# Altium PCB GMAX4651_MB.PcbDoc (part 2 of 2)
Units mm, origin at the board's own origin, x right, y up, seen from the top; angles counter-clockwise.
Board outline 185 x 150 mm, 2 copper layers (Top Layer, Bottom Layer); 162 components, 61 nets, 664 pads, 401 vias.
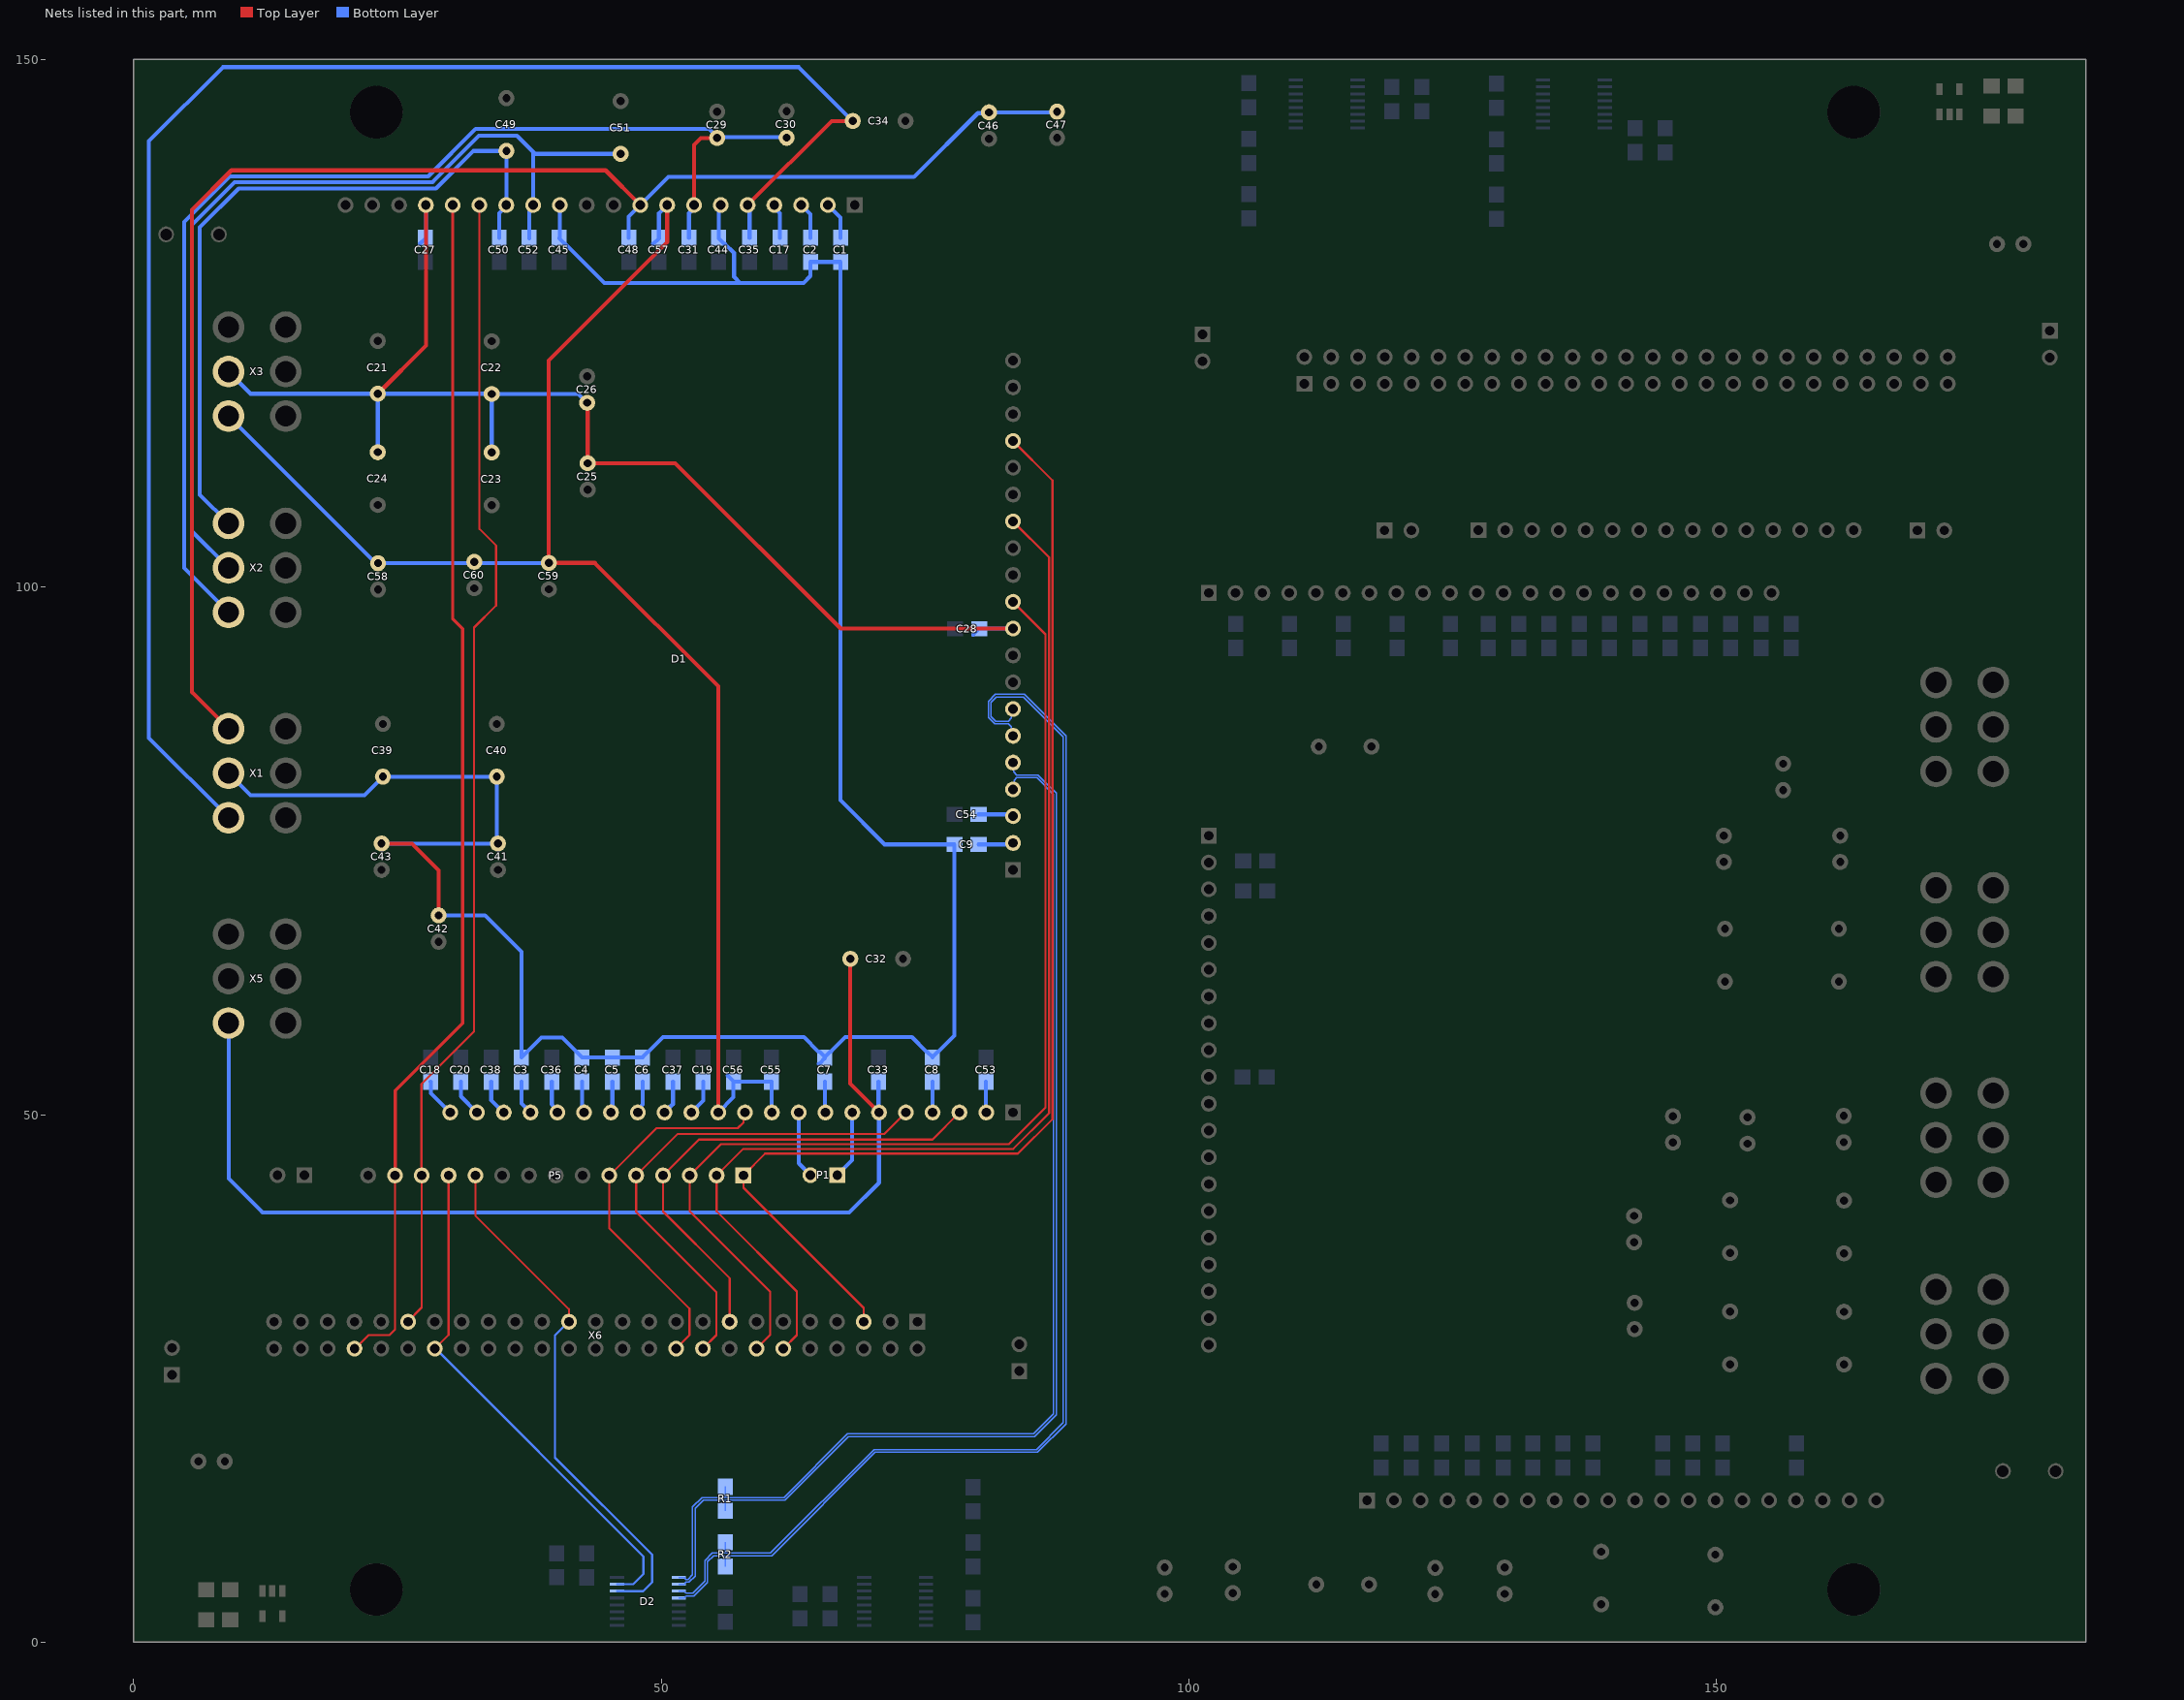
[diagram p2: the nets of this part, all layers, seen from the top]

## Via types
v1: diameter 0.6, hole 0.3, Top Layer to Bottom Layer, 401 vias

## Nets (pads, with @x,y where several pads share a name; then routed paths per layer and width w, separated by ;. In a path a pad name is that pad's centre, name@x,y a point inside that pad or via, vN(x,y) a via of type N, cw(c..) or ccw(c..) an arc to the next point about the centre after c; other vN are vias at no path point) (continued)
OUTT12: D2.14 P5.11 X6.27 | length 50.3
  Top Layer w0.203: P5.11@32.381,44.247 32.381,40.441 41.246,31.576 X6.27@41.246,30.378
  Bottom Layer w0.203: X6.27@41.235,30.389 39.929,29.083 39.929,17.501 49.124,8.306 49.124,5.69 48.281,4.847 D2.14@45.81,4.847
OUTT12_N: D1.48 D2.4 R2.2 | length 126.1
  Bottom Layer w0.127: D2.4@51.66,4.197 52.195,4.197 52.271,4.273 52.271,4.319 52.346,4.393 53.093,4.393 54.384,5.685 54.384,7.641 54.954,8.21 56.005,8.21 56.079,8.136 ; D1.48@83.332,85.908 83.172,86.068 83.172,86.774 82.903,87.043 81.58,87.043 80.998,87.625 80.998,89.184 81.656,89.843 84.409,89.843 88.344,85.908 88.344,77.47 88.344,20.696 85.657,18.009 70.264,18.009 60.466,8.21 56.633,8.21 56.154,8.21 56.079,8.136 ; 56.079,8.136 R2.2@56.079,7.196 56.079,8.136
OUTT12_P: D1.49 D2.3 R2.1 | length 124.4
  Bottom Layer w0.127: D2.3@51.66,4.847 52.195,4.847 52.271,4.77 52.271,4.725 52.346,4.65 52.986,4.65 54.127,5.791 54.127,7.747 54.848,8.467 56.005,8.467 56.079,8.541 ; D1.49@83.332,88.448 83.181,88.296 83.181,87.582 82.899,87.3 81.686,87.3 81.255,87.732 81.255,89.078 81.763,89.586 84.303,89.586 87.118,86.77 87.3,86.589 88.087,85.801 88.087,77.47 88.087,20.803 85.55,18.266 70.158,18.266 60.359,8.467 56.739,8.467 56.154,8.467 56.079,8.541 ; 56.079,8.541 R2.1@56.079,9.482 56.079,8.541
OUTT23: D2.15 P5.12 X6.38 | length 49.4
  Top Layer w0.203: X6.38@28.546,27.838 29.841,29.134 P5.12@29.841,44.247
  Bottom Layer w0.203: X6.38@28.573,27.866 48.311,8.128 48.311,6.477 47.331,5.497 D2.15@45.81,5.497
OUTT23_N: D1.46 D2.1 R1.1 | length 111
  Bottom Layer w0.127: D2.1@51.66,6.147 52.195,6.147 52.271,6.07 52.271,6.025 52.346,5.95 52.525,5.95 52.959,6.384 52.959,12.809 53.874,13.725 56.005,13.725 56.079,13.799 ; R1.1@56.079,14.739 56.079,13.799 ; D1.46@83.332,80.828 83.421,80.917 83.421,81.694 83.668,81.94 85.598,81.94 87.173,80.366 87.173,77.47 87.173,21.666 85.271,19.764 67.643,19.764 61.604,13.725 56.154,13.725 56.079,13.799
OUTT23_P: D1.47 D2.2 R1.2 | length 111.9
  Bottom Layer w0.127: D2.2@51.66,5.497 52.195,5.497 52.271,5.573 52.271,5.619 52.346,5.693 52.632,5.693 53.216,6.278 53.216,12.703 53.981,13.468 56.005,13.468 56.079,13.394 ; R1.2@56.079,12.453 56.079,13.394 ; D1.47@83.332,83.368 83.386,83.315 83.386,82.502 83.69,82.197 85.704,82.197 86.298,81.603 86.389,81.513 87.43,80.472 87.43,77.47 87.43,21.56 85.377,19.507 67.75,19.507 61.71,13.468 56.154,13.468 56.079,13.394
SPI_CLK: D1.56 P5.2 X6.12 | length 111.5
  Top Layer w0.203: X6.12@61.566,27.838 62.84,29.112 62.84,33.249 55.241,40.847 P5.2@55.241,44.247 57.756,46.761 83.359,46.761 86.739,50.142 86.739,102.821 D1.56@83.332,106.228
SPI_EN: D1.59 P5.1 X6.5 | length 115.9
  Top Layer w0.203: X6.5@69.186,30.378 69.186,31.678 57.781,43.082 P5.1@57.781,44.247 59.839,46.304 83.791,46.304 87.067,49.581 87.067,110.113 D1.59@83.332,113.848
SPI_IN: D1.53 P5.3 X6.14 | length 105.7
  Top Layer w0.203: X6.14@59.026,27.838 60.321,29.134 60.321,33.227 52.701,40.847 P5.3@52.701,44.247 55.673,47.219 82.953,47.219 86.411,50.677 86.411,95.529 D1.53@83.332,98.608
SPI_OUT: D1.32 P5.6 X6.20 | length 35.9
  Top Layer w0.203: X6.20@51.406,27.838 52.676,29.108 52.676,31.627 45.081,39.221 P5.6@45.081,44.247 49.552,48.717 57.248,48.717 57.803,49.272 57.803,50.078 D1.32@57.932,50.208
SYS_RST_N: D1.40 P5.4 X6.15 | length 47
  Top Layer w0.203: X6.15@56.486,30.378 56.486,34.497 50.161,40.822 P5.4@50.161,44.247 53.565,47.65 75.695,47.65 D1.40@78.252,50.208
TDIG0: D1.15 P5.13 X6.39 | length 109.9
  Top Layer w0.203: X6.39@25.98,30.404 27.301,31.725 P5.13@27.301,44.247 ; P5.13@27.276,44.247 27.276,52.908 32.254,57.887 32.254,96.161 34.337,98.243 34.337,103.937 32.772,105.501 D1.15@32.772,136.208
TDIG1: D1.16 P5.14 X6.44 | length 114.2
  Top Layer w0.203: X6.44@20.964,27.8 22.272,29.108 24.228,29.108 24.761,29.642 P5.14@24.761,44.247
  Top Layer w0.305: P5.14@24.787,44.247 24.787,52.299 31.162,58.674 31.162,96.067 30.232,96.996 D1.16@30.232,136.208
TEXP0: D1.38 P5.5 X6.18 | length 48.1
  Top Layer w0.203: X6.18@53.946,27.838 55.216,29.108 55.216,33.176 47.621,40.771 P5.5@47.621,44.247 51.558,48.184 71.148,48.184 D1.38@73.172,50.208
VBG: C18.1 D1.21 | length 3.7
  Bottom Layer w0.381: C18.1@28.139,53.129 28.181,53.087 28.181,52.019 D1.21@29.992,50.208
VBPRL: C1.1 D1.2 | length 3.6
  Bottom Layer w0.381: D1.2@65.792,136.208 66.976,135.024 C1.1@66.976,133.103
VCBN: C17.1 D1.4 | length 3.3
  Bottom Layer w0.381: D1.4@60.712,136.208 60.712,135.949 61.236,135.425 C17.1@61.236,133.103
VCBP: C2.1 D1.3 | length 3.5
  Bottom Layer w0.381: D1.3@63.252,136.208 64.131,135.329 C2.1@64.131,133.103
VCIBP: C6.1 D1.28 | length 3.1
  Bottom Layer w0.381: D1.28@47.772,50.208 47.772,50.511 48.231,50.969 C6.1@48.231,53.129
VCLBN: C54.1 D1.45 | length 3.3
  Bottom Layer w0.381: C54.1@80.064,78.461 83.16,78.461 D1.45@83.332,78.288
VCLBP: C9.1 D1.44 | length 3.3
  Bottom Layer w0.381: C9.1@80.064,75.616 83.2,75.616 D1.44@83.332,75.748
VCLCN: C19.1 D1.30 | length 3.4
  Bottom Layer w0.381: D1.30@52.852,50.208 53.971,51.327 C19.1@53.971,53.129
VCLPCN: C38.1 D1.23 | length 3.4
  Bottom Layer w0.381: C38.1@33.88,53.129 33.88,51.401 D1.23@35.072,50.208
VCLPCP: C3.1 D1.24 | length 3.3
  Bottom Layer w0.381: C3.1@36.75,53.129 36.75,51.07 D1.24@37.612,50.208
VDD13: C21.1 C22.1 C23.1 C24.1 C25.1 C26.1 C27.1 C28.1 D1.17 D1.52 X3.2 | length 126.5
  Top Layer w0.381: C21.1@23.136,118.328 27.692,122.885 D1.17@27.692,136.208 ; C26.1@42.973,117.47 43.024,117.419 C25.1@43.024,111.74 51.328,111.74 67,96.068 D1.52@83.332,96.068
  Bottom Layer w0.381: X3.2@8.999,120.426 11.097,118.328 C21.1@23.136,118.328 ; C24.1@23.136,112.787 C21.1@23.136,118.328 ; C27.1@27.136,132.532 27.657,133.052 C27.1@27.657,133.103 27.692,133.139 D1.17@27.692,136.208 ; C23.1@33.931,112.761 C22.1@33.931,118.302 ; C26.1@42.973,117.47 42.14,118.302 C22.1@33.931,118.302 ; C28.1@79.569,95.491 79.569,95.542 80.09,96.063 C28.1@80.141,96.063 83.327,96.063 D1.52@83.332,96.068 ; C21.1@23.136,118.328 33.905,118.328 C22.1@33.931,118.302
VDD33A: C1.2 C2.2 C3.2 C4.2 C5.2 C6.2 C7.2 C8.2 C9.2 C39.1 C40.1 C41.1 C42.1 C43.1 C44.1 C45.1 D1.6 D1.12 X1.2 | length 245.1
  Top Layer w0.381: C43.1@23.491,75.697 26.36,75.697 28.901,73.156 C42.1@28.901,68.89
  Bottom Layer w0.381: X1.2@8.999,82.361 11.071,80.289 21.876,80.289 C39.1@23.618,82.031 C40.1@34.413,82.031 34.413,75.799 C41.1@34.515,75.697 C43.1@23.491,75.697 ; C42.1@28.901,68.89 33.294,68.89 36.75,65.434 C3.2@36.75,55.415 38.637,57.302 40.603,57.302 C4.2@42.49,55.415 C5.2@45.361,55.415 C6.2@48.231,55.415 48.231,55.466 48.751,55.987 48.802,55.987 50.169,57.353 63.514,57.353 64.88,55.987 64.982,55.987 C7.2@65.503,55.466 ; D1.12@40.392,136.208 40.392,133.164 C45.1@40.331,133.103 40.331,133.052 40.852,132.532 40.903,132.532 44.606,128.829 57.476,128.829 ; D1.6@55.632,136.208 55.444,136.02 C44.1@55.444,133.103 55.444,133.052 55.965,132.532 56.016,132.532 56.892,131.656 56.892,129.413 57.476,128.829 ; C7.2@64.931,54.844 64.982,54.844 65.503,55.364 C7.2@65.503,55.415 C7.2@65.503,55.466 ; C8.2@75.688,55.415 C8.2@75.688,55.466 ; 57.476,128.829 63.475,128.829 64.131,129.485 C2.2@64.131,130.817 C1.2@66.976,130.817 66.976,79.807 71.167,75.616 C9.2@77.778,75.616 77.778,57.506 76.26,55.987 76.209,55.987 C8.2@75.688,55.466 ; C7.2@65.503,55.466 66.023,55.987 66.074,55.987 67.441,57.353 73.75,57.353 75.117,55.987 75.168,55.987 C8.2@75.688,55.466
VDDCH: C29.1 C30.1 C31.1 D1.7 X2.1 | length 111
  Top Layer w0.381: D1.7@53.092,136.208 53.092,141.916 53.741,142.565 C29.1@55.296,142.565
  Bottom Layer w0.381: X2.1@8.999,97.602 4.801,101.801 4.801,134.62 9.093,138.913 27.915,138.913 32.41,143.408 54.534,143.408 55.296,142.646 61.818,142.646 C30.1@61.874,142.59 ; C31.1@52.625,133.103 52.625,135.438 D1.7@53.092,135.905
VDDCL_RF_RS: C55.1 C56.1 C57.1 C58.1 C59.1 C60.1 D1.8 D1.31 D1.33 X3.1 | length 151.4
  Top Layer w0.381: C58.1@22.942,102.266 C58.1@23.161,102.266 ; D1.8@50.552,136.208 50.552,132.696 39.341,121.484 C59.1@39.341,102.291 43.708,102.291 55.392,90.607 D1.31@55.392,50.208
  Bottom Layer w0.381: X3.1@8.999,116.208 22.942,102.266 C58.1@23.161,102.266 39.315,102.266 C59.1@39.341,102.291 ; C57.1@49.209,132.532 49.26,132.532 49.78,133.052 C57.1@49.78,133.103 49.78,135.427 50.552,136.199 D1.8@50.552,136.208 ; D1.31@55.392,50.208 56.841,51.657 C56.1@56.841,53.129 ; C56.1@56.27,53.701 56.321,53.701 56.841,53.18 C56.1@56.841,53.129 ; D1.33@60.472,50.208 60.448,50.232 C55.1@60.448,53.129 C56.1@56.841,53.129
VDDPIX: C32.1 C33.1 D1.37 X5.1 | length 104.1
  Top Layer w0.381: C32.1@67.905,64.77 67.905,52.935 D1.37@70.632,50.208
  Bottom Layer w0.381: X5.1@8.999,58.684 8.999,43.956 12.214,40.742 67.814,40.742 70.632,43.56 D1.37@70.632,50.208 70.583,50.258 C33.1@70.583,53.129
VDN: D1.36 P1.1 | length 6.5
  Bottom Layer w0.381: P1.1@66.671,44.272 68.092,45.693 D1.36@68.092,50.208
VDP: D1.34 P1.2 | length 6.4
  Bottom Layer w0.381: D1.34@63.012,50.208 63.012,45.391 P1.2@64.131,44.272
VGRSH: C34.1 C35.1 D1.5 X1.1 | length 155.5
  Top Layer w0.381: D1.5@58.172,136.208 66.135,144.17 C34.1@68.137,144.17
  Bottom Layer w0.381: X1.1@8.999,78.143 1.448,85.695 1.448,142.265 8.458,149.276 63.032,149.276 C34.1@68.137,144.17 ; D1.5@58.126,136.254 D1.5@58.172,136.208 58.365,136.015 C35.1@58.365,133.103
VGRSL: C46.2 C47.2 C48.1 D1.9 X1.3 | length 142.7
  Top Layer w0.381: X1.3@8.999,86.578 5.537,90.04 5.537,135.763 9.271,139.497 44.724,139.497 D1.9@48.012,136.208
  Bottom Layer w0.381: C48.1@46.91,133.103 46.91,135.106 D1.9@48.012,136.208 50.666,138.862 73.939,138.862 79.997,144.919 80.982,144.919 C46.2@81.051,144.989 87.427,144.989 C47.2@87.503,145.065
VLSBN: C36.1 D1.25 | length 3.1
  Bottom Layer w0.381: C36.1@39.62,53.129 39.62,50.991 40.152,50.458 D1.25@40.152,50.208
VPBN: C53.1 D1.41 | length 2.9
  Bottom Layer w0.381: C53.1@80.768,53.129 80.768,50.232 D1.41@80.792,50.208
VPBP: C8.1 D1.39 | length 2.9
  Bottom Layer w0.381: C8.1@75.688,53.129 75.712,53.105 D1.39@75.712,50.208
VPCN: C37.1 D1.29 | length 3.2
  Bottom Layer w0.381: D1.29@50.312,50.208 51.101,50.997 C37.1@51.101,53.129
VPCP: C7.1 D1.35 | length 2.9
  Bottom Layer w0.381: C7.1@65.503,53.129 65.503,50.258 D1.35@65.552,50.208
VRBP: C4.1 D1.26 | length 3
  Bottom Layer w0.381: C4.1@42.49,53.129 42.49,50.41 D1.26@42.692,50.208
VRCP: C5.1 D1.27 | length 3
  Bottom Layer w0.381: D1.27@45.232,50.208 45.361,50.336 C5.1@45.361,53.129
VREF: C20.1 D1.22 | length 3.6
  Bottom Layer w0.381: C20.1@31.01,53.129 31.01,51.731 D1.22@32.532,50.208
VTX1H: C51.1 C52.1 D1.13 X2.2 | length 87.1
  Bottom Layer w0.381: X2.2@8.999,101.82 5.537,105.282 5.537,134.341 9.576,138.379 28.321,138.379 32.715,142.773 36.322,142.773 37.852,141.243 ; C52.1@37.487,133.052 C52.1@37.487,133.103 37.487,135.539 37.852,135.905 D1.13@37.852,136.208 37.852,141.243 ; C51.1@46.148,141.061 38.035,141.061 37.852,141.243
VTX1L: C49.2 C50.1 D1.14 X2.3 | length 69.8
  Bottom Layer w0.381: X2.3@8.999,106.037 6.274,108.763 6.274,134.087 9.957,137.77 28.651,137.77 32.222,141.34 C49.2@35.328,141.34 35.328,136.223 D1.14@35.312,136.208 35.312,136.096 34.642,135.425 C50.1@34.642,133.103
pads on no net: C1_1.1 C1_1.2 C2_1.1 C2_1.2 C3_1.1 C3_1.2 C4_1.1 C4_1.2 C5_1.1 C5_1.2 C6_1.1 C6_1.2 C7_1.1 C7_1.2 C8_1.1 C8_1.2 C9_1.1 C9_1.2 C10_1.1 C11_1.2 C12_1.2 C13_1.2 C14_1.2 C15_1.2 C16_1.2 C17_1.1 C18_1.1 C19_1.1 C20_1.1 C21_1.1 C22_1.1 C23_1.1 C24_1.1 C25_1.1 C26_1.1 C27_1.1 C28_1.1 C29_1.1 C30_1.1 C31_1.1 C32_1.1 C33_1.1 C34_1.1 C35_1.1 C36_1.1 C37_1.1 C38_1.1 C39_1.1 C40_1.1 C41_1.1 C42_1.1 C43_1.1 C44_1.1 C45_1.1 C46_1.2 C47_1.2 C48_1.1 C49_1.2 C50_1.1 C51_1.1 C52_1.1 C53_1.1 C54_1.1 C55_1.1 C56_1.1 C57_1.1 C58_1.1 C59_1.1 C60_1.1 D1_1.2 D1_1.3 D1_1.4 D1_1.5 D1_1.6 D1_1.7 D1_1.8 D1_1.9 D1_1.12 D1_1.13 D1_1.14 D1_1.15 D1_1.16 D1_1.17 D1_1.18 D1_1.19 D1_1.21 D1_1.22 D1_1.23 D1_1.24 D1_1.25 D1_1.26 D1_1.27 D1_1.28 D1_1.29 D1_1.30 D1_1.31 D1_1.32 D1_1.33 D1_1.34 D1_1.35 D1_1.36 D1_1.37 D1_1.38 D1_1.39 D1_1.40 D1_1.41 D1_1.44 D1_1.45 D1_1.46 D1_1.47 D1_1.48 D1_1.49 D1_1.50 D1_1.51 D1_1.52 D1_1.53 D1_1.54 D1_1.55 D1_1.56 D1_1.57 D1_1.58 D1_1.59 D1_1.60 D1_1.61 D2.5 D2.6 D2.11 D2_1.1 D2_1.2 D2_1.3 D2_1.4 D2_1.5 D2_1.6 D2_1.7 D2_1.8 D2_1.10 D2_1.11 D2_1.13 D2_1.14 D2_1.15 D2_1.16 D3.5 D3.6 D3.11 D3_1.1 D3_1.2 D3_1.3 D3_1.4 D3_1.5 D3_1.6 D3_1.7 D3_1.8 D3_1.10 D3_1.11 D3_1.13 D3_1.14 D3_1.15 D3_1.16 D4_1.1 D4_1.3 D4_1.4 D4_1.5 P1_1.1 P1_1.2 P5_1.1 P5_1.2 P5_1.3 P5_1.4 P5_1.5 P5_1.6 P5_1.7 P5_1.8 P5_1.9 P5_1.10 P5_1.11 P5_1.12 P5_1.13 P5_1.14 P5_1.15 R1_1.1 R1_1.2 R2_1.1 R2_1.2 R4_1.1 R4_1.2 R5_1.1 R5_1.2 R6_1.1 R6_1.2 R8_1.1 R8_1.2 X1_1.1 X1_1.2 X1_1.3 X2_1.1 X2_1.2 X2_1.3 X3_1.1 X3_1.2 X3_1.3 X4_1.1 X5.3 X5_1.1 X5_1.2 X5_1.3 X6.2 X6.3 X6_1.2 X6_1.3 X6_1.5 X6_1.12 X6_1.14 X6_1.15 X6_1.18 X6_1.20 X6_1.21 X6_1.23 X6_1.24 X6_1.26 X6_1.27 X6_1.38 X6_1.39 X6_1.41 X6_1.44
copper on no net: | length 4336
  Top Layer w0.127: 160.052,13.44 161.119,13.44 161.193,13.366 161.193,12.285 161.933,11.545 165.931,11.545 166.662,12.277 166.662,94.167 174.692,102.196 174.692,145.734 174.313,146.113 173.087,146.113 173.012,146.187 173.012,147.184 ; 162.592,13.44 161.525,13.44 161.45,13.366 161.45,12.391 162.04,11.802 165.824,11.802 166.405,12.384 166.405,94.273 174.435,102.303 174.435,145.627 174.206,145.856 173.087,145.856 173.012,145.782 173.012,144.784
  Top Layer w0.203: 101.872,35.8 98.137,39.535 98.137,100.067 101.414,103.344 125.366,103.344 127.423,105.401 127.423,106.566 116.019,117.971 116.019,119.27 ; 101.872,43.42 98.465,46.827 98.465,99.507 101.845,102.887 127.449,102.887 129.963,105.401 129.963,108.801 122.365,116.4 122.365,120.536 123.639,121.81 ; 101.872,51.04 98.793,54.119 98.793,98.971 102.252,102.43 129.531,102.43 132.503,105.401 132.503,108.801 124.883,116.421 124.883,120.514 126.179,121.81 ; 106.952,99.44 109.51,101.998 131.64,101.998 135.043,105.401 135.043,108.827 128.719,115.151 128.719,119.27 ; v1(111.748,138.396) 111.748,136.999 113.246,135.5 127.927,135.5 135.065,128.363 135.065,120.544 136.339,119.27 136.339,118.047 142.663,111.722 142.663,105.401 ; 112.032,99.44 114.056,101.464 133.646,101.464 137.583,105.401 137.583,108.877 129.989,116.472 129.989,120.54 131.259,121.81 ; v1(112.916,138.396) 112.916,137.482 113.526,136.872 128.791,136.872 137.605,128.058 137.605,120.544 138.879,119.27 138.879,118.098 145.203,111.773 145.203,105.401 ; v1(114.11,138.396) 129.147,138.396 138.879,128.664 138.879,121.81 140.119,120.569 140.119,118.101 147.743,110.478 147.743,105.401 ; 127.272,99.44 127.402,99.57 127.402,100.376 127.957,100.931 135.653,100.931 140.123,105.401 140.123,110.427 132.529,118.021 132.529,120.54 133.799,121.81 ; 141.419,121.81 142.659,120.569 142.659,118 150.283,110.376 150.283,105.401 ; 143.959,119.27 143.959,118.072 152.823,109.208 152.823,105.401 ; 152.432,13.44 152.432,44.147 150.867,45.711 150.867,51.405 152.95,53.488 152.95,91.762 157.929,96.74 157.929,105.401 ; 155.363,105.401 155.363,120.514 156.659,121.81 ; 157.903,105.401 157.903,117.924 159.224,119.244 ; 160.443,105.401 160.443,120.006 160.977,120.54 162.932,120.54 164.24,121.848 ; 161.739,119.27 163.923,117.085 ; 162.983,105.401 162.983,116.146 163.923,117.085 ; 171.112,147.184 169.431,147.184 168.085,145.838 168.085,118.533 166.637,117.085 163.923,117.085
  Top Layer w0.305: 154.972,13.44 154.972,52.652 154.042,53.582 154.042,90.974 160.418,97.35 160.418,105.401 ; 176.055,144.654 176.055,141.932 179.063,138.924 179.063,132.503
  Top Layer w0.381: 101.872,53.58 118.204,53.58 133.876,37.908 142.181,37.908 142.181,32.229 142.231,32.179 ; 114.572,99.44 117.299,96.713 117.299,84.878 ; 117.067,5.478 119.07,5.478 127.032,13.44 ; 129.812,99.44 129.812,59.041 141.496,47.357 145.864,47.357 145.864,28.164 134.652,16.952 134.652,13.44 ; 129.909,7.083 131.463,7.083 132.112,7.732 132.112,13.44 ; 137.192,13.44 140.481,10.151 175.933,10.151 179.667,13.885 179.667,59.608 176.205,63.07 ; 156.303,80.758 156.303,76.492 158.845,73.951 161.713,73.951 ; 157.512,13.44 157.512,26.764 162.069,31.32 ; 162.043,47.382 162.263,47.382 ; 171.112,144.784 171.184,144.856 171.184,145.61 172.047,146.473 172.047,148.099 172.581,148.632 175.679,148.632 176.004,148.308 176.004,147.499 ; 175.483,148.019 176.004,147.499 ; 176.055,144.654 176.055,147.499 176.004,147.499
  Bottom Layer w0.127: 101.872,30.72 102.126,30.974 102.126,31.695 102.35,31.919 104.077,31.919 104.737,31.259 104.737,30.243 104.077,29.582 98.794,29.582 95.775,32.601 95.593,32.783 93.764,34.612 93.764,72.178 93.764,140.898 99.356,146.49 102.541,146.49 105.652,146.49 105.789,146.353 ; 101.872,33.26 102.135,32.997 102.135,32.388 102.347,32.176 104.183,32.176 104.994,31.365 104.994,30.136 104.183,29.325 98.687,29.325 93.507,34.505 93.507,72.178 93.507,141.004 99.052,146.549 99.057,146.549 99.251,146.744 105.61,146.744 105.75,146.883 ; 101.872,38.34 101.915,38.383 101.915,39.206 102.194,39.485 103.902,39.485 104.432,38.955 104.432,37.888 103.747,37.202 98.743,37.202 95.75,40.196 95.568,40.377 94.552,41.393 94.552,72.178 94.552,135.598 100.16,141.207 105.606,141.207 105.681,141.132 ; 101.872,40.88 101.9,40.852 101.9,40.014 102.172,39.742 104.008,39.742 104.689,39.061 104.689,37.782 103.853,36.945 98.636,36.945 94.295,41.287 94.295,72.178 94.295,135.705 100.054,141.464 105.606,141.464 105.681,141.538 ; 101.872,45.96 101.743,46.09 101.743,46.826 101.486,47.083 97.516,47.083 96.468,48.131 96.377,48.222 95.133,49.466 95.133,72.178 95.133,130.311 101.053,136.231 105.598,136.231 105.681,136.314 ; 101.872,48.5 101.758,48.386 101.758,47.634 101.464,47.34 97.622,47.34 95.39,49.572 95.39,72.178 95.39,130.205 101.163,135.977 105.609,135.977 105.681,135.905 ; 101.872,56.12 102.042,56.29 102.042,56.986 102.299,57.243 103.696,57.243 104.051,56.887 104.051,55.567 103.442,54.957 101.003,54.957 98.036,57.925 97.854,58.107 96.228,59.732 96.228,72.178 96.228,129.506 99.349,132.627 113.98,132.627 127.791,146.439 128.005,146.439 129.063,146.439 129.125,146.377 129.125,146.365 ; 101.872,58.66 102.005,58.528 102.005,57.794 102.299,57.5 103.802,57.5 104.308,56.994 104.308,55.46 103.548,54.7 100.897,54.7 95.971,59.626 95.971,72.178 95.971,129.612 99.243,132.884 113.873,132.884 127.685,146.696 129.047,146.696 129.125,146.774 ; 101.872,61.2 102.024,61.352 102.024,62.066 102.306,62.348 103.518,62.348 103.95,61.917 103.95,60.57 103.442,60.062 100.902,60.062 98.086,62.878 97.905,63.06 97.117,63.847 97.117,72.178 97.117,128.846 99.654,131.383 115.047,131.383 124.845,141.181 128.465,141.181 129.051,141.181 129.125,141.107 ; 101.872,63.74 102.032,63.58 102.032,62.874 102.301,62.605 103.624,62.605 104.207,62.023 104.207,60.464 103.548,59.805 100.795,59.805 96.86,63.741 96.86,72.178 96.86,128.952 99.548,131.64 114.94,131.64 124.739,141.438 128.571,141.438 129.051,141.438 129.125,141.512 ; 101.872,66.28 101.819,66.333 101.819,67.146 101.514,67.451 99.5,67.451 98.906,68.045 98.815,68.136 97.775,69.176 97.775,72.178 97.775,128.088 99.827,130.141 117.455,130.141 123.494,136.18 129.051,136.18 129.125,136.255 ; 101.872,68.82 101.783,68.731 101.783,67.954 101.537,67.708 99.606,67.708 98.032,69.283 98.032,72.178 98.032,127.982 99.934,129.884 117.561,129.884 123.6,135.923 129.051,135.923 129.125,135.849 ; 105.04,146.116 105.681,145.475 105.789,145.583 105.789,146.353 ; 105.067,147.148 105.681,147.761 105.75,147.692 105.75,146.883 ; 105.681,134.96 105.681,135.905 ; 105.681,137.246 105.681,136.314 ; 105.681,140.192 105.681,141.132 ; 105.681,142.478 105.681,141.538 ; 105.956,136.231 105.743,136.231 105.681,136.293 105.681,136.314 ; 105.956,136.233 107.491,136.233 107.492,136.231 108.29,137.029 108.29,143.328 108.917,143.955 109.44,143.955 109.514,144.029 109.514,144.075 109.591,144.151 110.126,144.151 ; 110.126,143.501 109.591,143.501 109.514,143.578 109.514,143.627 109.44,143.701 109.026,143.701 108.547,143.222 108.547,136.923 107.836,136.212 107.832,136.212 107.596,135.976 105.751,135.976 105.681,135.905 ; 110.126,144.801 109.591,144.801 109.514,144.878 109.514,144.924 109.44,144.998 109.053,144.998 107.633,143.578 107.633,141.665 107.175,141.207 105.755,141.207 105.681,141.132 ; 110.126,145.451 109.591,145.451 109.514,145.375 109.514,145.329 109.44,145.255 108.947,145.255 107.376,143.684 107.376,141.771 107.068,141.464 105.743,141.464 105.681,141.526 105.681,141.538 ; 110.126,147.401 109.591,147.401 109.514,147.478 109.514,147.524 109.44,147.598 108.453,147.598 107.341,146.487 105.882,146.487 105.789,146.394 105.789,146.353 ; 110.126,148.051 109.591,148.051 109.514,147.975 109.514,147.929 109.44,147.855 108.346,147.855 107.235,146.744 105.889,146.744 105.75,146.883 ; 129.125,134.909 129.125,135.849 ; 129.125,137.195 129.125,136.255 ; 129.125,145.424 129.125,146.365 ; 129.125,147.71 129.125,146.774 ; 133.545,143.501 133.01,143.501 132.933,143.578 132.933,143.624 132.859,143.698 132.679,143.698 132.245,143.264 132.245,136.839 131.33,135.923 129.199,135.923 129.125,135.849 ; 133.545,144.151 133.01,144.151 132.933,144.075 132.933,144.029 132.859,143.955 132.573,143.955 131.988,143.371 131.988,136.945 131.223,136.18 129.199,136.18 129.125,136.255 ; 133.545,144.801 133.01,144.801 132.933,144.878 132.933,144.924 132.859,144.998 132.218,144.998 131.077,143.857 131.077,141.901 130.357,141.181 129.199,141.181 129.125,141.107 ; 133.545,145.451 133.01,145.451 132.933,145.375 132.933,145.329 132.859,145.255 132.111,145.255 130.82,143.963 130.82,142.008 130.25,141.438 129.199,141.438 129.125,141.512 ; 133.545,147.401 133.01,147.401 132.933,147.478 132.933,147.524 132.859,147.598 132.329,147.598 131.17,146.439 129.199,146.439 129.125,146.365 ; 133.545,148.051 133.01,148.051 132.933,147.975 132.933,147.929 132.859,147.855 132.222,147.855 131.063,146.696 129.203,146.696 129.125,146.774 ; 129.125,141.107 129.125,140.167 129.125,141.107 ; 129.125,141.512 129.125,142.453 129.125,141.512
  Bottom Layer w0.203: v1(111.748,138.396) 111.748,145.762 113.387,147.401 115.976,147.401 ; v1(112.916,138.396) 112.916,143.654 114.064,144.801 115.976,144.801 ; v1(114.11,138.396) 114.11,143.628 114.633,144.151 115.976,144.151 ; 139.395,144.151 137.874,144.151 136.894,143.171 136.894,141.52 156.631,121.782 ; 139.395,144.801 136.924,144.801 136.081,143.959 136.081,141.342 145.276,132.148 145.276,120.565 143.969,119.259 ; 139.395,147.401 135.841,147.401 135.09,146.651 135.09,141.292 141.419,134.963 141.419,121.81
  Bottom Layer w0.305: 115.976,143.501 117.386,143.501 117.666,143.781 117.666,146.016 ; 115.976,145.451 117.101,145.451 117.666,146.016 ; 139.395,143.501 142.267,143.501 142.268,143.503 ; 139.395,145.451 141.649,145.451 141.948,145.152 ; 145.093,143.503 142.268,143.503 ; 176.205,86.747 179.058,89.599 179.058,132.503 ; 117.666,146.016 117.666,146.778 118.234,147.347 119.19,147.347 119.224,147.38 122.064,147.38 124.847,147.38 126.53,149.064 141.466,149.064 141.948,148.581 141.948,145.152 ; 141.948,145.152 141.948,143.823 142.268,143.503
  Bottom Layer w0.381: 97.701,4.583 97.778,4.66 104.153,4.66 104.222,4.729 105.208,4.729 111.265,10.786 134.538,10.786 137.192,13.44 138.294,14.543 138.294,16.545 ; 101.872,53.58 101.877,53.585 105.064,53.585 105.115,53.585 105.635,54.106 105.635,54.157 ; 101.872,71.36 102.045,71.188 105.14,71.188 ; 101.872,73.9 102.004,74.032 105.14,74.032 ; 104.412,99.44 104.436,99.416 104.436,96.519 ; 109.492,99.44 109.492,96.543 109.516,96.519 ; 109.516,94.233 109.516,94.182 ; 114.622,96.519 114.622,99.391 114.572,99.44 114.572,106.088 117.39,108.907 172.991,108.907 176.205,105.692 176.205,90.964 ; 117.067,5.478 121.402,1.143 177.517,1.143 183.757,7.383 183.757,63.953 176.205,71.505 ; 117.112,99.44 117.112,103.955 118.533,105.376 ; 118.228,16.545 118.228,14.624 119.412,13.44 ; 119.652,99.44 119.702,99.391 119.702,96.519 ; 120.273,94.804 120.222,94.804 119.702,94.284 119.702,94.233 119.702,94.182 ; 121.073,16.545 121.073,14.319 121.952,13.44 ; 121.073,105.376 122.192,104.257 122.192,99.44 ; 123.33,7.058 123.386,7.002 129.909,7.002 130.671,6.24 152.794,6.24 157.29,10.736 176.111,10.736 180.404,15.028 180.404,47.847 176.205,52.046 ; 123.969,16.545 123.969,14.223 124.492,13.7 124.492,13.44 ; 124.732,99.44 124.756,99.416 124.756,96.519 128.363,96.519 ; 126.839,16.545 126.839,13.633 127.032,13.44 127.078,13.394 ; 128.934,95.947 128.883,95.947 128.363,96.468 128.363,96.519 ; 129.572,13.44 129.76,13.628 129.76,16.545 129.76,16.596 129.239,17.116 129.188,17.116 128.312,17.993 128.312,20.235 127.728,20.819 ; 129.812,99.44 128.363,97.991 128.363,96.519 ; 131.233,96.519 131.233,98.321 132.352,99.44 ; 132.112,13.743 132.579,14.21 132.579,16.545 ; 134.103,96.519 134.103,98.652 134.892,99.44 ; 134.652,13.44 134.652,13.449 135.424,14.221 135.424,16.545 135.424,16.596 135.945,17.116 135.996,17.116 ; 136.974,96.519 136.974,98.679 137.432,99.137 137.432,99.44 ; 139.056,8.587 147.17,8.587 147.352,8.405 ; 139.844,96.519 139.844,99.312 139.972,99.44 ; 142.231,32.179 143.064,31.346 151.274,31.346 ; 142.512,99.44 142.714,99.238 142.714,96.519 ; 144.812,13.44 144.812,16.484 144.873,16.545 144.873,16.596 144.352,17.116 144.301,17.116 140.598,20.819 127.728,20.819 ; 145.052,99.44 145.052,99.19 145.584,98.658 145.584,96.519 ; 145.093,143.503 150.964,143.503 159.474,134.992 178.169,134.992 179.063,134.098 179.063,132.503 ; 145.864,47.357 145.889,47.382 162.043,47.382 162.263,47.382 176.205,33.44 ; 147.592,99.44 148.454,98.578 148.454,96.519 ; 147.718,16.596 147.718,16.545 147.718,14.109 147.352,13.743 147.352,13.44 147.352,8.405 ; 150.132,99.44 151.325,98.248 151.325,96.519 ; 150.563,16.545 150.563,14.223 149.892,13.552 149.892,13.44 149.877,13.425 149.877,8.308 152.983,8.308 156.553,11.879 175.248,11.879 178.931,15.562 178.931,40.885 176.205,43.611 ; 151.274,36.887 151.274,31.346 ; 152.672,99.44 154.195,97.917 154.195,96.519 ; 155.212,99.44 157.023,97.629 157.023,96.561 157.065,96.519 ; 156.303,80.758 151.91,80.758 148.454,84.214 148.454,94.233 146.567,92.346 144.601,92.346 142.714,94.233 139.844,94.233 136.974,94.233 136.974,94.182 136.453,93.661 136.402,93.661 135.036,92.295 121.69,92.295 120.324,93.661 120.222,93.661 119.702,94.182 ; 157.512,13.44 157.512,16.509 157.548,16.545 157.548,16.596 158.068,17.116 ; 161.713,73.951 150.69,73.951 150.791,73.849 150.791,67.617 161.586,67.617 163.328,69.359 174.134,69.359 176.205,67.287 ; 162.069,36.861 162.069,31.32 ; 162.289,13.44 162.592,13.44 ; 176.205,29.223 174.107,31.32 162.069,31.32 ; 176.205,47.828 179.667,44.366 179.667,15.308 175.629,11.269 156.883,11.269 152.489,6.875 148.882,6.875 147.352,8.405 ; 109.516,94.182 108.996,93.661 108.945,93.661 107.426,92.143 107.426,74.032 114.037,74.032 118.228,69.841 118.228,18.831 121.073,18.831 121.073,20.163 121.73,20.819 127.728,20.819 ; 109.516,94.182 110.037,93.661 110.088,93.661 111.454,92.295 117.764,92.295 119.13,93.661 119.181,93.661 119.702,94.182 ; 151.274,31.346 151.299,31.32 162.069,31.32
  Bottom Layer w0.508: 176.205,25.005 176.205,17.144 177.127,16.222

## Polygon pours and split planes (outlines as drawn)
GND on Top Layer "Top Overlay-No Net" (solid, remove dead copper, pour order 1): 0,150 0,0 185,0 185,150
GND on Bottom Layer "Top Overlay-No Net" (solid, remove dead copper, pour order 0): 0,150 185,150 185,0 0,0

## Keep-outs
Keep-Out Layer:
  the board outline again, w0.254

## Other copper
Multi-Layer:
  pour cut-out: 28,10 28,0 18,0 18,10
  pour cut-out: 168,10 168,0 158,0 158,10
  pour cut-out: 168,150 168,140 158,140 158,150
  pour cut-out: 28,150 28,140 18,140 18,150

## Silkscreen, mask and mechanical layers (free items; w line width, h text height)
Top Overlay:
  lines w0.254: 92.5,0 92.5,144 92.5,150
  text "2" at 8.223,128.634 h1
  text "GMAX4651 / Channel B" at 133.877,126.763 h1.52
  text "SYS_RST_N" at 134.724,115.568 h1 r270
  text "SPI_CLK" at 129.517,113.402 h1 r270
  text "SPI_OUT" at 139.83,113.402 h1 r270
  text "OUTT23" at 154.809,112.569 h1 r270
  text "SPI_EN" at 127.003,112.402 h1 r270
  text "OUTT12" at 152.37,112.402 h1 r270
  text "SPI_IN" at 131.981,112.236 h1 r270
  text "TEXP0" at 137.029,111.569 h1 r270
  text "OUTT0" at 142.109,111.569 h1 r270
  text "CLKT2" at 149.703,111.569 h1 r270
  text "TDIG0" at 157.476,111.403 h1 r270
  text "CLKIN" at 162.454,111.403 h1 r270
  text "OUTT1" at 144.7,111.236 h1 r270
  text "CLKT1" at 147.163,111.236 h1 r270
  text "TDIG1" at 160.041,111.07 h1 r270
  text "1" at 8.262,109.787 h1
  text "P" at 123.001,104.927 h1
  text "N" at 116.041,104.876 h1
  text "3" at 176.679,94.852 h1
  text "0" at 8.07,90.254 h1
  text "0" at 176.502,75.014 h1
  text "3" at 8.02,70.722 h1
  text "1" at 176.668,55.939 h1
  text "N" at 68.497,43.772 h1
  text "P" at 61.537,43.722 h1
  text "CLKIN" at 21.751,42.744 h1 r270
  text "TDIG1" at 24.164,42.744 h1 r270
  text "TDIG0" at 26.729,42.744 h1 r270
  text "OUTT23" at 29.396,42.744 h1 r270
  text "OUTT12" at 31.834,42.744 h1 r270
  text "CLKT2" at 34.501,42.744 h1 r270
  text "CLKT1" at 37.041,42.744 h1 r270
  text "OUTT1" at 39.505,42.744 h1 r270
  text "OUTT0" at 42.096,42.744 h1 r270
  text "SPI_OUT" at 44.541,42.744 h1 r270
  text "TEXP0" at 47.176,42.744 h1 r270
  text "SYS_RST_N" at 49.647,42.744 h1 r270
  text "SPI_IN" at 52.39,42.744 h1 r270
  text "SPI_CLK" at 54.854,42.744 h1 r270
  text "SPI_EN" at 57.368,42.744 h1 r270
  text "2" at 176.502,37.168 h1
  text "GMAX4651 / Channel A" at 37.87,18.416 h1.52
Bottom Overlay:
  text "+" at 3.305,138.489 h1
  text "+" at 181.899,11.159 h1 r180

## Text inside footprints (layer, text, board x,y; h text height)
C10: Bottom Overlay "-" at 8.562,16.824 h1.52 r135
C10_1: Bottom Overlay "-" at 176.643,132.825 h1.52 r315
C21: Bottom Overlay "-" at 24.374,122.82 h1.52 r270
C21_1: Bottom Overlay "-" at 160.831,26.828 h1.52 r90
C22: Bottom Overlay "-" at 35.169,122.795 h1.52 r270
C22_1: Bottom Overlay "-" at 150.036,26.854 h1.52 r90
C23: Bottom Overlay "-" at 32.692,108.269 h1.52 r90
C23_1: Bottom Overlay "-" at 152.512,41.379 h1.52 r270
C24: Bottom Overlay "-" at 21.897,108.295 h1.52 r90
C24_1: Bottom Overlay "-" at 163.307,41.354 h1.52 r270
C25: Bottom Overlay "-" at 42.172,109.06 h1.52 r45
C25_1: Bottom Overlay "-" at 143.033,40.588 h1.52 r225
C26: Bottom Overlay "-" at 43.325,119.649 h1.52 r225
C26_1: Bottom Overlay "-" at 141.879,29.999 h1.52 r45
C29: Bottom Overlay "-" at 56.148,145.244 h1.52 r225
C29_1: Bottom Overlay "-" at 129.056,4.404 h1.52 r45
C30: Bottom Overlay "-" at 62.227,144.77 h1.52 r225
C30_1: Bottom Overlay "-" at 122.978,4.878 h1.52 r45
C32: Bottom Overlay "-" at 72.397,63.532 h1.52 r180
C32_1: Bottom Overlay "-" at 112.807,86.116 h1.52
C34: Bottom Overlay "-" at 72.63,142.932 h1.52 r180
C34_1: Bottom Overlay "-" at 112.575,6.716 h1.52
C39: Bottom Overlay "-" at 24.856,86.523 h1.52 r270
C39_1: Bottom Overlay "-" at 160.348,63.125 h1.52 r90
C40: Bottom Overlay "-" at 35.651,86.523 h1.52 r270
C40_1: Bottom Overlay "-" at 149.553,63.125 h1.52 r90
C41: Bottom Overlay "-" at 33.663,73.018 h1.52 r45
C41_1: Bottom Overlay "-" at 151.542,76.63 h1.52 r225
C42: Bottom Overlay "-" at 28.549,66.711 h1.52 r45
C42_1: Bottom Overlay "-" at 156.655,82.938 h1.52 r225
C43: Bottom Overlay "-" at 22.639,73.018 h1.52 r45
C43_1: Bottom Overlay "-" at 162.565,76.63 h1.52 r225
C46: Bottom Overlay "-" at 81.904,145.168 h1.52 r225
C46_1: Bottom Overlay "-" at 103.301,4.48 h1.52 r45
C47: Bottom Overlay "-" at 87.855,144.744 h1.52 r225
C47_1: Bottom Overlay "-" at 97.349,4.904 h1.52 r45
C49: Bottom Overlay "-" at 34.089,141.848 h1.52 r90
C49_1: Bottom Overlay "-" at 151.115,7.8 h1.52 r270
C51: Bottom Overlay "-" at 47.266,145.364 h1.52 r270
C51_1: Bottom Overlay "-" at 137.939,4.284 h1.52 r90
C58: Bottom Overlay "-" at 22.309,99.586 h1.52 r45
C58_1: Bottom Overlay "-" at 162.896,50.062 h1.52 r225
C59: Bottom Overlay "-" at 38.989,100.112 h1.52 r45
C59_1: Bottom Overlay "-" at 146.216,49.537 h1.52 r225
C60: Bottom Overlay "-" at 31.927,100.213 h1.52 r45
C60_1: Bottom Overlay "-" at 153.277,49.435 h1.52 r225
D1: Top Overlay "G" at 67.778,134.32 h1 r270; Top Overlay "VBPRL" at 65.238,134.32 h1 r270; Top Overlay "VCBP" at 62.85,134.32 h1 r270; Top Overlay "VCBN" at 60.285,134.32 h1 r270; Top Overlay "VGRSH" at 57.719,134.32 h1 r270; Top Overlay "VDDIO" at 55.078,134.32 h1 r270; Top Overlay "VDDCH" at 52.411,134.32 h1 r270; Top Overlay "VDDCL" at 50.074,134.32 h1 r270; Top Overlay "VGRSL" at 47.483,134.32 h1 r270; Top Overlay "G" at 44.943,134.32 h1 r270; Top Overlay "G" at 42.479,134.32 h1 r270; Top Overlay "VDD33A" at 39.914,134.32 h1 r270; Top Overlay "VTX1H" at 37.374,134.32 h1 r270; Top Overlay "VTX1L" at 34.834,134.32 h1 r270; Top Overlay "TDIG0" at 32.243,134.32 h1 r270; Top Overlay "VDD13D" at 27.29,134.32 h1 r270; Top Overlay "G" at 19.492,134.32 h1 r270; Top Overlay "G" at 82.814,52.694 h1 r270; Top Overlay "VPBN" at 80.3,55.694 h1 r270; Top Overlay "RST" at 77.785,54.694 h1 r270; Top Overlay "VPBP" at 75.144,55.694 h1 r270; Top Overlay "TEXP0" at 72.705,56.693 h1 r270; Top Overlay "VDDPIX" at 70.089,57.526 h1 r270; Top Overlay "VDN" at 67.574,54.694 h1 r270; Top Overlay "VPCP" at 65.085,55.694 h1 r270; Top Overlay "VDP" at 62.444,54.694 h1 r270; Top Overlay "VRS" at 60.031,54.694 h1 r270; Top Overlay "SPI_OUT" at 57.447,58.526 h1 r270; Top Overlay "VRF" at 54.874,54.694 h1 r270; Top Overlay "VCLCN" at 52.36,56.693 h1 r270; Top Overlay "VCIBP" at 47.28,56.536 h1 r270; Top Overlay "VLSBN" at 39.66,56.695 h1 r270; Top Overlay "VCLPCP" at 37.171,57.693 h1 r270; Top Overlay "VCLPCN" at 34.529,57.693 h1 r270; Top Overlay "VBG" at 29.525,54.694 h1 r270; Top Overlay "TDIG1" at 29.703,134.32 h1 r270; Top Overlay "CLKIN_P" at 24.634,134.326 h1 r270; Top Overlay "CLKIN_N" at 22.17,134.326 h1 r270; Top Overlay "VPCN" at 49.82,55.687 h1 r270; Top Overlay "VRCP" at 44.714,55.687 h1 r270; Top Overlay "VRBP" at 42.174,55.687 h1 r270; Top Overlay "VREF" at 32.091,55.687 h1 r270; Top Overlay "G" at 80.969,120.919 h1; Top Overlay "G" at 80.969,72.608 h1; Top Overlay "VCLBP" at 76.97,75.148 h1; Top Overlay "VCLBN" at 76.97,77.764 h1; Top Overlay "OUTT23_N" at 73.971,80.26 h1; Top Overlay "OUTT23_P" at 73.971,82.851 h1; Top Overlay "OUTT12_N" at 74.138,85.34 h1; Top Overlay "OUTT12_P" at 74.134,87.912 h1; Top Overlay "CLKT2_N" at 74.982,90.529 h1; Top Overlay "CT2_P" at 76.973,92.942 h1; Top Overlay "13AD" at 78.137,95.493 h1; Top Overlay "S_IN" at 78.137,98.04 h1; Top Overlay "CLKT1_N" at 75.138,100.707 h1; Top Overlay "CLKT1_P" at 75.138,103.044 h1; Top Overlay "SPI_CLK" at 75.138,105.711 h1; Top Overlay "OUTT1_N" at 75.138,108.277 h1; Top Overlay "OUTT1_P" at 75.138,110.791 h1; Top Overlay "SPI_EN" at 76.137,113.255 h1; Top Overlay "OUTT0_N" at 74.982,115.903 h1; Top Overlay "OUTT0_P" at 74.932,118.392 h1
D1_1: Top Overlay "OUTT0_P" at 103.608,30.423 h1; Top Overlay "OUTT0_N" at 103.558,32.912 h1; Top Overlay "SPI_EN" at 103.569,35.56 h1; Top Overlay "OUTT1_P" at 103.569,38.024 h1; Top Overlay "OUTT1_N" at 103.569,40.538 h1; Top Overlay "SPI_CLK" at 103.569,43.104 h1; Top Overlay "CLKT1_P" at 103.569,45.771 h1; Top Overlay "CLKT1_N" at 103.569,48.108 h1; Top Overlay "S_IN" at 103.569,50.775 h1; Top Overlay "13AD" at 103.569,53.155 h1; Top Overlay "CT2_P" at 103.567,55.873 h1; Top Overlay "CLKT2_N" at 103.558,58.286 h1; Top Overlay "OUTT12_P" at 103.573,60.903 h1; Top Overlay "OUTT12_N" at 103.569,63.475 h1; Top Overlay "OUTT23_P" at 103.569,65.964 h1; Top Overlay "OUTT23_N" at 103.569,68.555 h1; Top Overlay "VCLBN" at 103.569,70.884 h1; Top Overlay "VCLBP" at 103.569,73.501 h1; Top Overlay "G" at 103.569,76.041 h1; Top Overlay "G" at 103.569,27.73 h1; Top Overlay "VREF" at 152.114,97.626 h1 r270; Top Overlay "VRBP" at 142.03,97.626 h1 r270; Top Overlay "VRCP" at 139.49,97.626 h1 r270; Top Overlay "VPCN" at 134.385,97.626 h1 r270; Top Overlay "CLKIN_N" at 162.201,21.82 h1 r270; Top Overlay "CLKIN_P" at 159.737,21.82 h1 r270; Top Overlay "TDIG1" at 154.502,19.494 h1 r270; Top Overlay "VBG" at 154.68,97.62 h1 r270; Top Overlay "VCLPCN" at 149.676,97.62 h1 r270; Top Overlay "VCLPCP" at 147.034,97.62 h1 r270; Top Overlay "VLSBN" at 144.545,97.618 h1 r270; Top Overlay "VCIBP" at 136.925,97.611 h1 r270; Top Overlay "VCLCN" at 131.845,97.62 h1 r270; Top Overlay "VRF" at 129.33,97.62 h1 r270; Top Overlay "SPI_OUT" at 126.924,97.62 h1 r270; Top Overlay "VRS" at 124.174,97.62 h1 r270; Top Overlay "VDP" at 121.761,97.62 h1 r270; Top Overlay "VPCP" at 119.12,97.62 h1 r270; Top Overlay "VDN" at 116.63,97.62 h1 r270; Top Overlay "VDDPIX" at 114.116,97.62 h1 r270; Top Overlay "TEXP0" at 111.5,97.62 h1 r270; Top Overlay "VPBP" at 109.061,97.62 h1 r270; Top Overlay "RST" at 106.42,97.62 h1 r270; Top Overlay "VPBN" at 103.905,97.62 h1 r270; Top Overlay "G" at 101.39,97.62 h1 r270; Top Overlay "G" at 164.713,15.995 h1 r270; Top Overlay "VDD13D" at 156.915,20.827 h1 r270; Top Overlay "TDIG0" at 151.962,19.827 h1 r270; Top Overlay "VTX1L" at 149.371,19.827 h1 r270; Top Overlay "VTX1H" at 146.831,19.827 h1 r270; Top Overlay "VDD33A" at 144.291,20.993 h1 r270; Top Overlay "G" at 141.726,15.995 h1 r270; Top Overlay "G" at 139.262,15.995 h1 r270; Top Overlay "VGRSL" at 136.722,19.994 h1 r270; Top Overlay "VDDCL" at 134.131,19.994 h1 r270; Top Overlay "VDDCH" at 131.794,19.994 h1 r270; Top Overlay "VDDIO" at 129.127,19.827 h1 r270; Top Overlay "VGRSH" at 126.486,19.994 h1 r270; Top Overlay "VCBN" at 123.92,18.994 h1 r270; Top Overlay "VCBP" at 121.355,18.994 h1 r270; Top Overlay "VBPRL" at 118.967,19.994 h1 r270; Top Overlay "G" at 116.427,15.995 h1 r270